# Altium PCB PCB2.PcbDoc
Units mil, origin at the board's own origin, x right, y up, seen from the top; angles counter-clockwise.
Board outline 2885 x 4260 mil, 2 copper layers (Top Layer, Bottom Layer); 27 components, 44 nets, 157 pads, 0 vias.
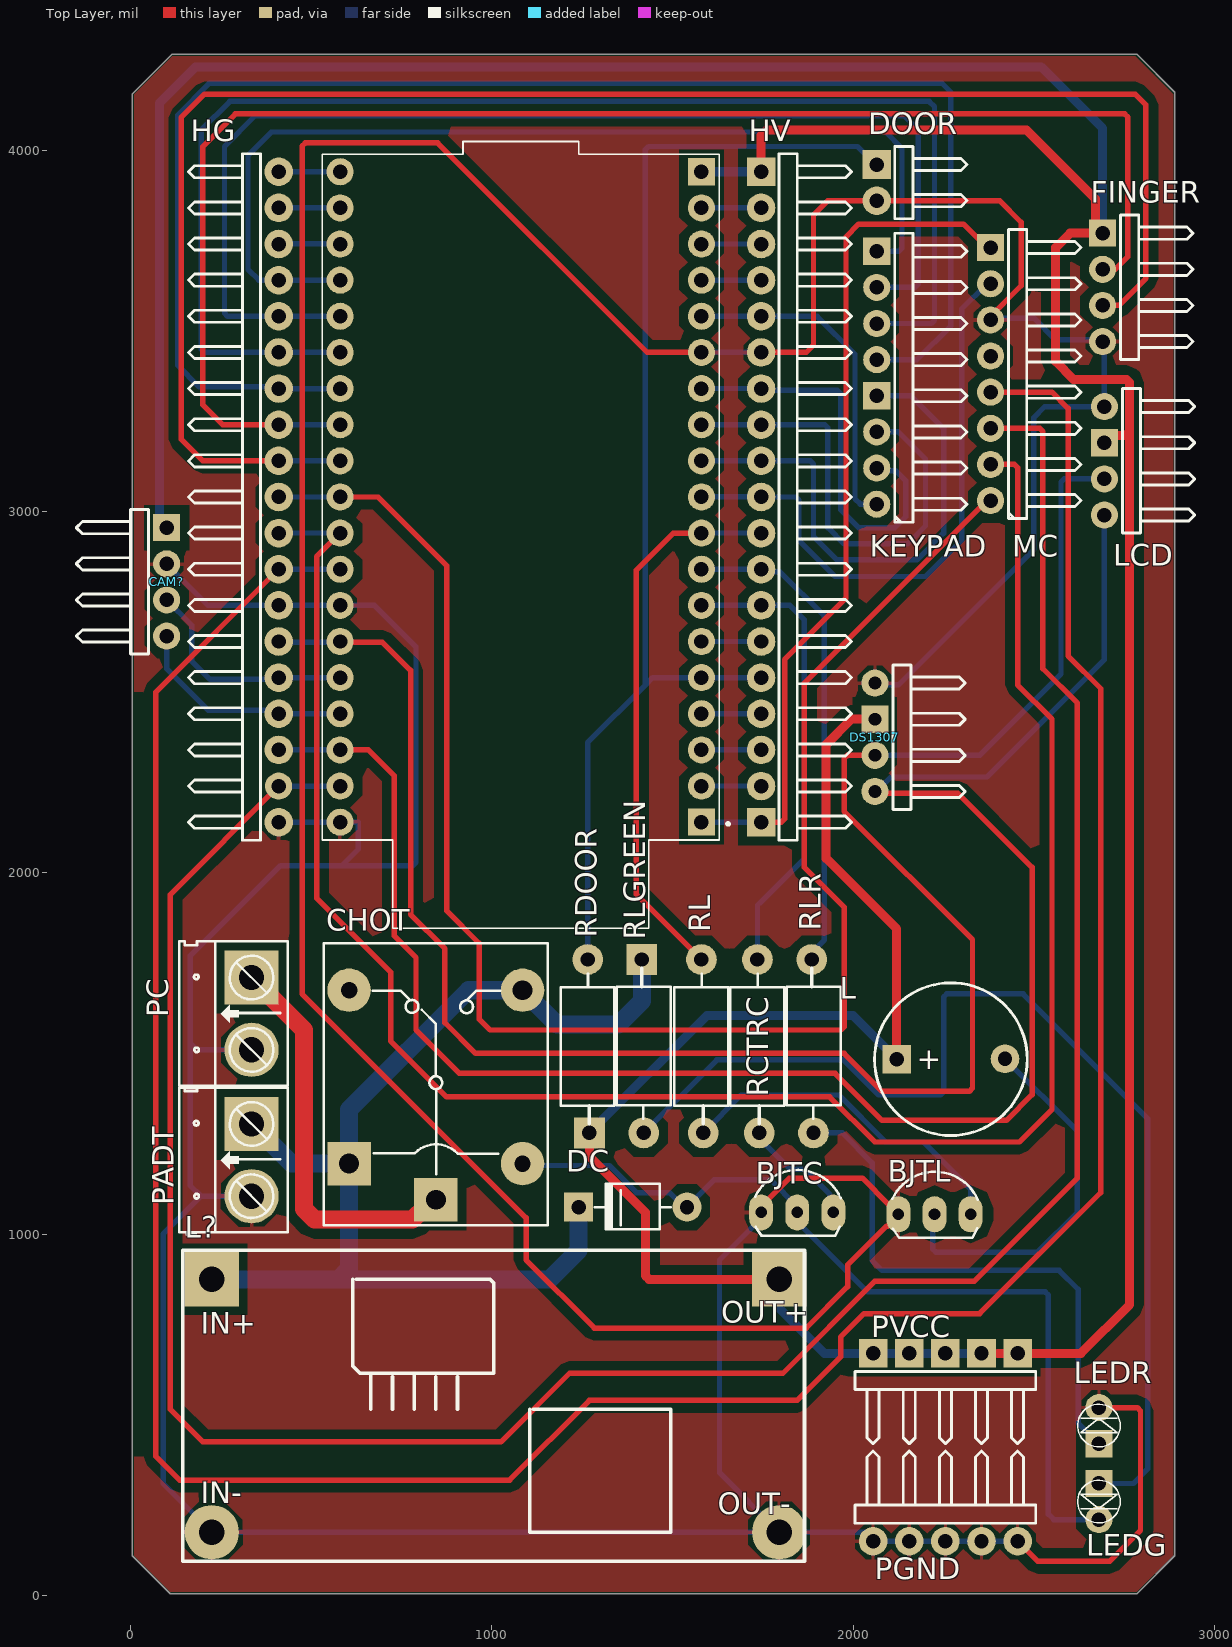
[diagram p0: Top Layer view]
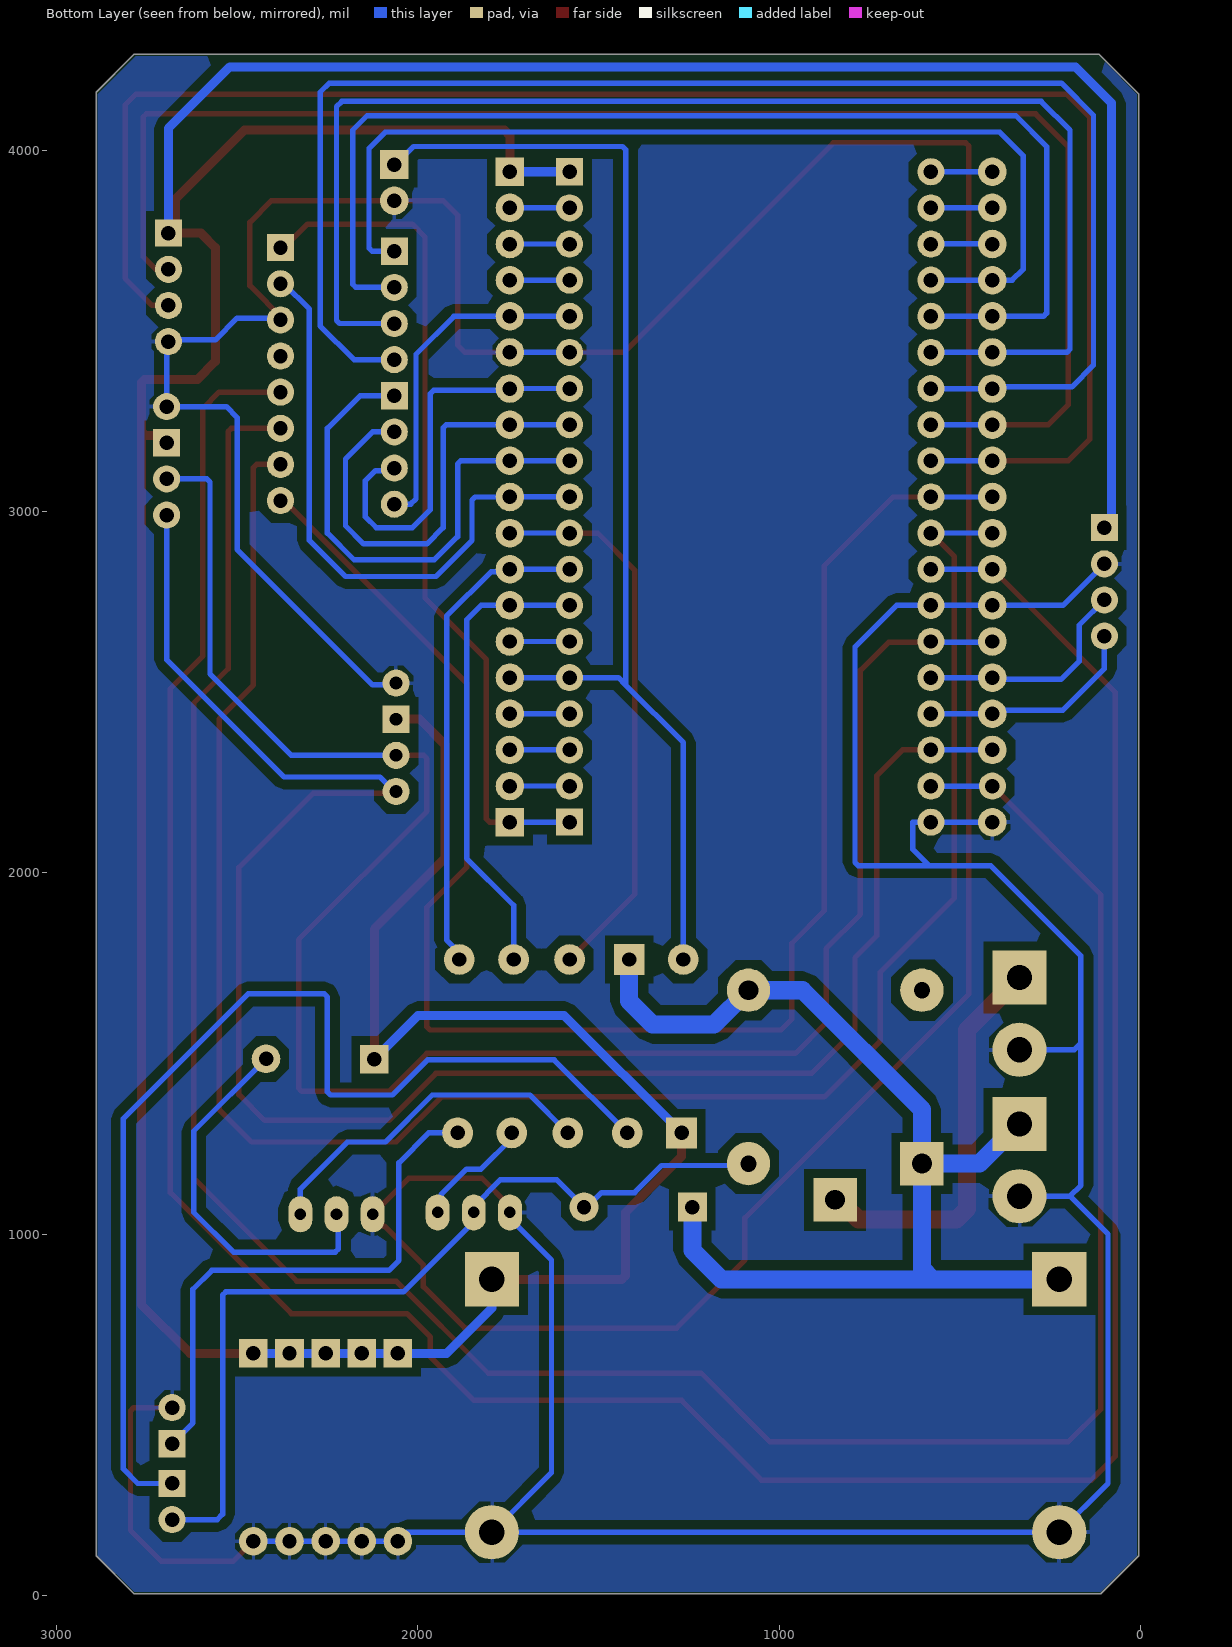
[diagram p1: Bottom Layer view, seen from below]
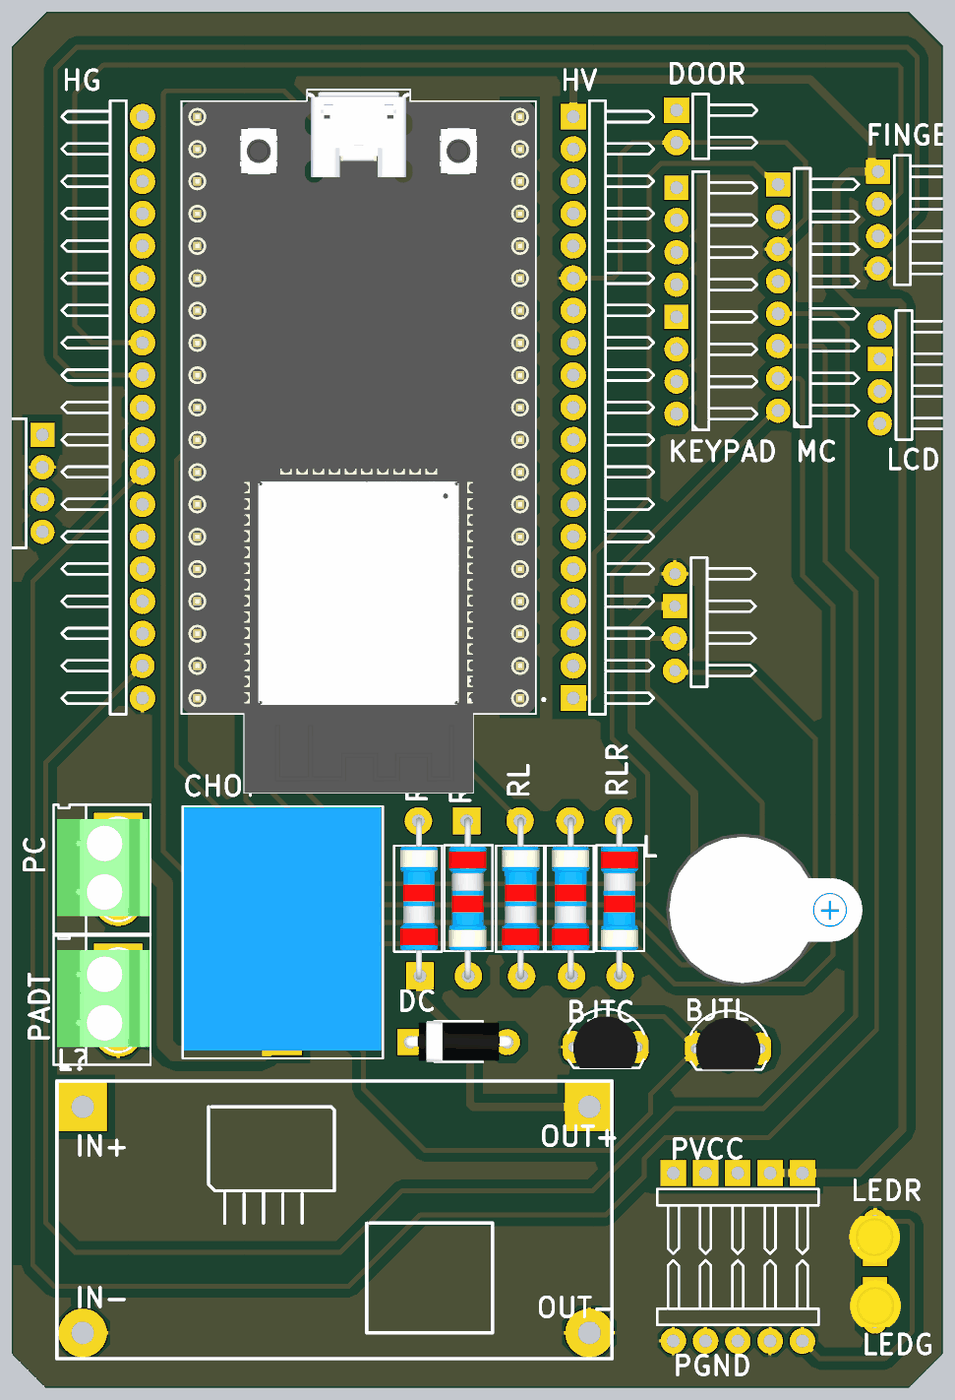
[diagram p2: 3D render of the assembled board from above, using the file's embedded part models]

## Layer stack, top to bottom
Top Solder: solder mask 0.4, Solder Resist, Dk 3.5
Top Layer: signal copper 1.4
Dielectric 1: dielectric 12.6, FR-4, Dk 4.8
Bottom Layer: signal copper 1.4
Bottom Solder: solder mask 0.4, Solder Resist, Dk 3.5

## Board outline
5,110 110,5 2785,5 2890,110 2890,4160 2785,4265 115,4265 5,4155

## Design rules (kind name [scope] priority, off if disabled: settings)
Clearance Clearance_3 [InNamedPolygon('NONET_L02_P-001')] p1: gap=25 ignorepadtopadclearanceinfootprint=TRUE
Clearance Clearance_2 [InNamedPolygon('NONET_L02_P-001')] p2: gap=10 ignorepadtopadclearanceinfootprint=FALSE except(0: Arc-Hole Track-Hole SMDPad-Hole THPad-Hole Via-Hole Fill-Hole Poly-Hole Region-Hole Text-Hole)
Clearance Clearance_1 [InNamedPolygon('NONET_L02_P-001')] p3: gap=25 ignorepadtopadclearanceinfootprint=TRUE
Clearance [All] p4: gap=10 ignorepadtopadclearanceinfootprint=FALSE except(0: Arc-Hole Track-Hole SMDPad-Hole THPad-Hole Via-Hole Fill-Hole Poly-Hole Region-Hole Text-Hole)
PolygonConnect [All] p1: connectstyle=Relief reliefconductorwidth=10 reliefentries=4 polygonreliefangle="90 Angle" airgapwidth=10
RoutingVias [All] p1: holewidth=28 width=50 viastyle="Through Hole" minholewidth=28 minwidth=50 maxholewidth=28 maxwidth=50
SolderMaskExpansion [All] p1: expansion=4 istentingtop=FALSE
Width [All] p1: maxlimit=100 minlimit=10 preferedwidth=15 toplayer_minwidth=15 minimp=50.000000 maximp=50.000000 favimp=50.000000
30 further rules are at their usual default settings.

## Components (designator, comment, footprint, x,y, rotation, side; value= is the part's Value field where it differs from the comment)
BJTC "" TO92 1845,1060 r0 top value=C9014
BJTL "" TO92 2225,1055 r0 top value=C9014
CAM? "" HDR1X4H#1 100,2955 r270 top
CHOT "" "RELAY 5" 845,1420 r90 top value="Relay SPDT, 10A, 12V"
DC "100v" "DIODE 1A" 1590,1075 r0 top
DOOR "" HDR1X2H 2065,3860 r90 top
DS1307 "" HDR1X4H#2 2060,2225 r90 top
FINGER "" HDR1X4H#3 2690,3470 r90 top
HG "" HDR1X19H#1 410,3940 r270 top
HV "" HDR1X19H#2 1745,2140 r90 top
KEYPAD "" HDR1X8H#1 2065,3020 r90 top
L "" "Coi Chip Speacker" 2120,1484.5 r0 top
L? "BUCK_LM2596" BUCK_LM2596 995,555 r0 top
LCD "" HDR1X4H#4 2695,2990 r90 top
LEDG "LED" LED-3MM-YELLOW 2680,310 r270 top value="LED 3 ly Single Colour"
LEDR "LED" LED-3MM-YELLOW 2680,420 r90 top value="LED 3 ly Single Colour"
MC "" HDR1X8H#2 2380,3030 r90 top
PADT "" "Con 2 KF301 5.08" 335,1105 r90 top
PC "" "Con 2 KF301 5.08" 335,1510 r90 top
PGND "eader 5H" HDR1X5H#1 2455,150 r180 top
PVCC "" HDR1X5H#2 2055,670 r0 top
RCTRC "" RES-1/2W#1 1735,1500 r90 top
RDOOR "" RES-1/2W#2 1265,1500 r90 top
RL "" RES-1/2W#1 1580,1500 r90 top
RLGREEN "" RES-1/2W#2 1420,1540 r270 top
RLR "" RES-1/2W#1 1890,1540 r270 top
U? "ESP32-DEVKITC" MODULE_ESP32-DEVKITC 1080,3039.61 r180 top

## Footprints (in the part's own frame and the unit in brackets; to place one, negate y for a bottom-side part, rotate by r counter-clockwise, add the part's x,y. Pads: shape width x height; smd on the part's side, far side on the other; paste and mask are expansions set on the pad)
BUCK_LM2596 [mil]
  rect 150x150 hole 70: 1(-770,320) 4(800,320)
  round 150 hole 70: 2(-770,-380) 3(800,-380)
  silkscreen extent -850,-460 870,400
"Coi Chip Speacker" [mil]
  rect 79.06x79.06 hole 40: 1(0,0)
  round 79.06 hole 40: 2(300,0.5)
  silkscreen extent -61,-212 362,211, body extent -87,-236 521,236, height 177
"Con 2 KF301 5.08" [mil]
  round 150 hole 70: 1(0,0)
  rect 150x150 hole 70: 2(200,0)
  silkscreen extent -106,-100 300,200, body extent -45,-97 255,190, height 335
"DIODE 1A" [mil] "Diode 1A"
  round 80 hole 40: 1(-50,0)
  rect 80x80 hole 40: 2(-350,0)
  silkscreen extent -305,-61 -95,65, body extent -366,-61 -34,65, height 122
HDR1X2H [mil] "Connector; Header; 2 Position; Right Angle"
  round 79.06 hole 40: 1(0,0)
  rect 79.06x79.06 hole 40: 2(100,0)
  silkscreen extent -50,-250 150,-50
HDR1X4H#1 [mil] "Connector; Header; 4 Position; Right Angle"
  rect 75x75 hole 40: 1(0,0)
  round 75 hole 40: 2(100,0) 3(200,0) 4(300,0)
  silkscreen extent -50,-250 350,-50
HDR1X4H#2 [mil] "Connector; Header; 4 Position; Right Angle"
  round 75 hole 35.43: 1(0,0) 2(100,0) 4(300,0)
  rect 75x75 hole 35.43: 3(200,0)
  silkscreen extent -50,-250 350,-50
HDR1X4H#3 [mil] "Connector; Header; 4 Position; Right Angle"
  round 75 hole 40: 1(0,0) 2(100,0) 3(200,0)
  rect 75x75 hole 40: 4(300,0)
  silkscreen extent -50,-250 350,-50
HDR1X4H#4 [mil] "Connector; Header; 4 Position; Right Angle"
  round 75 hole 40: 1(0,0) 2(100,0) 4(300,0)
  rect 75x75 hole 40: 3(200,0)
  silkscreen extent -50,-250 350,-50
HDR1X5H#1 [mil] "Connector; Header; 5 Position; Right Angle"
  round 79.06 hole 40: 1(0,0) 2(100,0) 3(200,0) 4(300,0) 5(400,0)
  silkscreen extent -50,-250 450,-50
HDR1X5H#2 [mil] "Connector; Header; 5 Position; Right Angle"
  rect 79.06x79.06 hole 40: 1(0,0) 2(100,0) 3(200,0) 4(300,0) 5(400,0)
  silkscreen extent -50,-250 450,-50
HDR1X8H#1 [mil] "Connector; Header; 8 Position; Right Angle"
  round 75 hole 40: 1(0,0) 2(100,0) 3(200,0) 5(400,0) 6(500,0) 7(600,0)
  rect 75x75 hole 40: 4(300,0) 8(700,0)
  silkscreen extent -50,-250 750,-50
HDR1X8H#2 [mil] "Connector; Header; 8 Position; Right Angle"
  round 75 hole 40: 1(0,0) 2(100,0) 3(200,0) 4(300,0) 5(400,0) 6(500,0) 7(600,0)
  rect 75x75 hole 40: 8(700,0)
  silkscreen extent -50,-250 750,-50
HDR1X19H#1 [mil] "Connector; Header; 19 Position; Right Angle"
  round 79.06 hole 40: 1(0,0) 2(100,0) 3(200,0) 4(300,0) 5(400,0) 6(500,0) 7(600,0) 8(700,0) 9(800,0) 10(900,0) 11(1000,0) 12(1100,0) 13(1200,0) 14(1300,0) 15(1400,0) 16(1500,0) 17(1600,0) 19(1800,0)
  round 75 hole 40: 18(1700,0)
  silkscreen extent -50,-250 1850,-50
HDR1X19H#2 [mil] "Connector; Header; 19 Position; Right Angle"
  rect 79.06x79.06 hole 40: 1(0,0) 19(1800,0)
  round 79.06 hole 40: 2(100,0) 3(200,0) 4(300,0) 5(400,0) 6(500,0) 7(600,0) 8(700,0) 9(800,0) 10(900,0) 11(1000,0) 12(1100,0) 13(1200,0) 14(1300,0) 15(1400,0) 16(1500,0) 17(1600,0) 18(1700,0)
  silkscreen extent -50,-250 1850,-50
LED-3MM-YELLOW [mil]
  rect 75x75 hole 40: 1(0,0)
  round 75 hole 40: 2(100,0)
  silkscreen extent -9,-59 109,59, body extent -27,-77 117,80, height 181
MODULE_ESP32-DEVKITC [mil]
  rect 75x75 hole 40: 1(-500,899.61) 19(-500,-900.39)
  round 75 hole 40: 2(-500,799.61) 3(-500,699.61) 4(-500,599.61) 5(-500,499.61) 6(-500,399.61) 7(-500,299.61) 8(-500,199.61) 9(-500,99.61) 10(-500,-0.39) 11(-500,-100.39) 12(-500,-200.39) 13(-500,-300.39) 14(-500,-400.39) 15(-500,-500.39) 16(-500,-600.39) 17(-500,-700.39) 18(-500,-800.39) 20(500,-900.39) 21(500,-800.39) 22(500,-700.39) 23(500,-600.39) 24(500,-500.39) 25(500,-400.39) 26(500,-300.39) 27(500,-200.39) 28(500,-100.39) 29(500,-0.39) 30(500,99.61) 31(500,199.61) 32(500,299.61) 33(500,399.61) 34(500,499.61) 35(500,599.61) 36(500,699.61) 37(500,799.61) 38(500,899.61)
  silkscreen extent -578,-984 549,1193, body extent -550,-976 550,1193, height 128
"RELAY 5" [mil] "Reley DPDT, 8 pin, 1A, W400mil, L800mil,H 300mil"
  rect 120x120 hole 55: 1(-325,0) 5(-225,240)
  round 120 hole 45: 2(255,240) 4(-225,-240)
  round 120 hole 55: 3(255,-240)
  silkscreen extent -395,-310 385,310, body extent -371,-304 381,306, height 602
RES-1/2W#1 [mil]
  round 85 hole 40: 1(-220,-5) 2(260,0)
  silkscreen extent -195,-74 221,75, body extent -230,-60 270,56, height 121
RES-1/2W#2 [mil]
  rect 85x85 hole 40: 1(-220,-5)
  round 85 hole 40: 2(260,0)
  silkscreen extent -195,-74 221,75, body extent -230,-60 270,56, height 121
TO92 [mil] "TO-92"
  oval 66x100 hole 32: 1(-100,0) 2(0,0) 3(100,0)
  silkscreen extent -117,-65 120,118, body extent -109,-66 109,95, height 245

## Part data
BJTC BJTL: library part C1815, "NPN transistor"
CAM? DS1307 FINGER LCD: library part "Header 4H", "Header, 4-Pin, Right Angle", LatestRevisionDate=17-Jul-2002, LatestRevisionNote="Re-released for DXP Platform.", Publisher="Altium Limited"
CHOT: library part "Relay 5", "Relay SPDT,10A - 12VDC 5 Pin"
DC: library part "Diode 1N4007", "Cắm", Chung_Loai=Cắm, Don_Vi=Con, Ma_Hang=MH001063, Ten_Linh_Kien="Diode 1N4007 1A (DIP)"
DOOR: library part "Header 2H", "Header, 2-Pin, Right Angle", LatestRevisionDate=17-Jul-2002, LatestRevisionNote="Re-released for DXP Platform.", Publisher="Altium Limited"
HG HV: library part "Header 19H", "Header, 19-Pin, Right Angle", LatestRevisionDate=17-Jul-2002, LatestRevisionNote="Re-released for DXP Platform.", Publisher="Altium Limited"
KEYPAD MC: library part "Header 8H", "Header, 8-Pin, Right Angle", LatestRevisionDate=17-Jul-2002, LatestRevisionNote="Re-released for DXP Platform.", Publisher="Altium Limited"
L: library part "Coi Chip Speaker", "Còi chip"
LEDG LEDR: "LED Single colour Green and Red"
PADT PC: library part "CON 2 KF301", "Cắm", Chung_Loai=Cắm, Don_Vi=Con, Ma_Hang=MH000987, Ten_Linh_Kien="CON 2 KF301-2P 5.08MM Xanh Dương"
PGND PVCC: library part "Header 5H", "Header, 5-Pin, Right Angle", LatestRevisionDate=17-Jul-2002, LatestRevisionNote="Re-released for DXP Platform.", Publisher="Altium Limited"
RCTRC RDOOR RL RLGREEN RLR: library part Res, "Res", Manufacturer="Generic Components", Class=Passive, Published=08/06/2000, Publisher="Altium Hobart Technology Centre", SubClass=R
U?: "ESP32-WROOM-32UE series Transceiver; 802.11 b/g/n (Wi-Fi, WiFi, WLAN), Bluetooth Â® Smart Ready 4.x Dual Mode Evaluation Board", Package=None, Availability="In Stock", Check_prices=https://www.snapeda.com/parts/ESP32-DEVKITC/Espressif+Systems/view-part/?ref=eda, MF="Espressif Systems", MP=ESP32-DEVKITC, Price=None, Purchase-URL=https://pricing.snapeda.com/search/part/ESP32-DEVKITC/?ref=eda, SnapEDA_Link=https://www.snapeda.com/parts/ESP32-DEVKITC/Espressif+Systems/view-part/?ref=snap

## Nets (pads, with @x,y where several pads share a name; then routed paths per layer and width w, separated by ;. In a path a pad name is that pad's centre, name@x,y a point inside that pad or via, vN(x,y) a via of type N, cw(c..) or ccw(c..) an arc to the next point about the centre after c; other vN are vias at no path point)
3V3: HV.1 MC.8 U?.1 | length 2346.7
  Top Layer w15: HV.1 1801.21,2140 1810,2148.79 1810,2590 1980,2760 1980,3760 2015,3795 2305,3795 MC.8@2370,3730
  Bottom Layer w15: U?.1 HV.1
12V: CHOT.3 CHOT.5 DC.2 L?.1 PADT.2 RLGREEN.1 | length 3094.1
  Bottom Layer w50: L?.1 575,875 ; PADT.2 445,1195 CHOT.5 ; DC.2 1240,955 1160,875 575,875 ; RLGREEN.1 1415,1645 1350,1580 1180,1580 CHOT.3 935,1675 605,1345 CHOT.5 ; 575,875 605,905 CHOT.5
BUZZER: HV.9 RL.2 U?.9 | length 1550
  Top Layer w15: RL.2 1400,1940 1400,2838 1502,2940 U?.9
  Bottom Layer w15: U?.9@1570,2940.39 1580,2940.39 1580.2,2940.2 1744.8,2940.2 HV.9
C0: HV.11 KEYPAD.4 U?.11 | length 1444.2
  Bottom Layer w15: U?.11 HV.11 1881.21,3140 1890,3131.21 1890,2930.36 1954.5,2865.86 2175.86,2865.86 2250,2940 2250,3230 2160,3320 KEYPAD.4
C1: HV.12 KEYPAD.3 U?.12 | length 1290.1
  Bottom Layer w15: U?.12 HV.12 1921.21,3240 1930,3231.21 1930,2955 1975,2910 2149.64,2910 2200,2960.36 2200,3145 2125,3220 KEYPAD.3
C2: HV.13 KEYPAD.2 U?.13 | length 1129.7
  Bottom Layer w15: U?.13@1570,3340.39 1580,3340.39 1580.2,3340.2 1744.8,3340.2 HV.13 1750,3335 1956.21,3335 1965,3326.21 1965,3005 2015,2955 2115,2955 2145,2985 2145,3085 2117.03,3112.97 2072.03,3112.97 KEYPAD.2
C3: HV.15 KEYPAD.1 U?.15 | length 934.7
  Bottom Layer w15: U?.15 HV.15 1900,3540 2005,3435 2005,3035 2020,3020 KEYPAD.1
CLK: HG.11 MC.2 U?.30 | length 5554.5
  Top Layer w15: U?.30 515,2875 515,1930 720,1725 720,1535 875,1380 1935,1380 2060,1255 2460,1255 2550,1345 2550,2425 2455,2520 2455,3121.21 2446.21,3130 MC.2
  Bottom Layer w15: HG.11 410.2,2940.2 569.8,2940.2 U?.30@570,2940.39
CRX: CAM?.4 HG.16 U?.35 | length 611.9
  Bottom Layer w15: CAM?.4 100,2565 215,2450 400,2450 HG.16 410.2,2440.2 569.8,2440.2 U?.35@570,2440.39
CTRL_C: HV.7 RCTRC.2 U?.7 | length 1283.2
  Bottom Layer w15: U?.7@1585.2,2740.2 1744.8,2740.2 HV.7 1825,2740 1865,2700 1865,2040 1740,1915 ; RCTRC.2 1735,1910
CTX: CAM?.3 HG.15 U?.34 | length 621.9
  Bottom Layer w15: CAM?.3 170,2685 170,2585 220,2535 405,2535 HG.15 410.2,2540.2 569.8,2540.2 U?.34@570,2540.39
DOOR: DOOR.2 HV.5 RDOOR.2 U?.5 | length 3300.1
  Bottom Layer w15: RDOOR.2 1265,2360 1425,2520 ; HV.5 U?.5 1445,2540 1425,2520 ; DOOR.2 2061.42,3960 2011.42,4010 1433.79,4010 1425,4001.21 1425,2520
GND: BJTC.1 BJTL.1 CAM?.2 DOOR.1 DS1307.4 FINGER.1 HG.13 HG.19 HV.14 L?.2 L?.3 LCD.4 LEDR.2 MC.6 PADT.1 PC.1 PGND.1 PGND.2 PGND.3 PGND.4 PGND.5 U?.14 U?.32 U?.38 | length 18325.4
  Top Layer w15: U?.14 1430,3440 850,4020 483.79,4020 475,4011.21 475,1665 1095,1045 1095,928.79 1283.79,740 1870,740 1984.75,854.75 1984.75,914.75 2092.26,1022.26 2095.46,1022.26 2125,1051.8 BJTL.1 2125,1058.2 2101.44,1081.76 2098.24,1081.76 2025,1155 1823,1155 1745,1077 BJTC.1 ; HV.14 1870,3440 1890,3460 1890,3820 1930,3860 DOOR.1 2405,3860 2465,3800 2465,3625 MC.6@2370,3530 ; PGND.3@2250,145 PGND.3 ; PGND.1 2510,95 2710,95 2795,180 2795,511.21 2786.21,520 LEDR.2
  Bottom Layer w15: CAM?.2 215,2740 HG.13 U?.32 675,2740 790,2625 790,2028.79 781.21,2020 585,2020 ; PADT.1 195,1105 ; PC.1 183.79,1510 165,1528.79 ; HG.19 U?.38 630,2140 630,2065 585,2020 ; U?.14 HV.14 ; BJTC.1 1745,1043 1630,928 1630,340 L?.3 ; DS1307.4@2050,2520 2125,2520 2500,2895 2500,3260 2530,3290 LCD.4 2695,3465 FINGER.1 ; MC.6@2370,3530 2375,3535 2500,3535 2560,3475 2670,3475 FINGER.1@2670,3470 ; PGND.1 PGND.2 PGND.3 PGND.4 PGND.5 2030,175 L?.3 ; 165,1528.79 165,1135 195,1105 ; 165,1528.79 165,1770 415,2020 585,2020 ; 195,1105 90,1000 90,310 L?.2 L?.3
LEDR: HV.8 RLR.1 U?.8 | length 1358.1
  Bottom Layer w15: U?.8@1580,2840.2 HV.8@1744.8,2840.2 ; HV.8 1751.36,2833.64 1796.36,2833.64 1920,2710 1920,1813.94 1885,1778.94 RLR.1
MISO: HG.12 MC.4 U?.31 | length 8220.8
  Top Layer w15: HG.12 70,2500 70,385 135.68,319.32 1049.32,319.32 1270,540 1845,540 1965,660 1965,715 2030,780 2350,780 2685,1115 2685,2510 2595,2600 2595,3285 2550,3330 MC.4@2370,3330
  Bottom Layer w15: HG.12 U?.31
MOSI: HG.18 MC.3 U?.37 | length 7133.1
  Top Layer w15: HG.18 110,1940 110,515 200,425 1025,425 1215,615 1805,615 2060,870 2335,870 2620,1155 2620,2469.66 2525,2564.66 2525,3221.21 2516.21,3230 MC.3 MC.3@2370,3230
  Bottom Layer w15: HG.18 U?.37
NetBJTC_2: BJTC.2 CHOT.4 DC.1 LEDG.2 | length 2444.8
  Bottom Layer w15: CHOT.4 1090,1190 1325,1190 1400,1115 1491.61,1115 1531.61,1075 DC.1 1615,1150 1772,1150 1845,1077 1845,1035 2040,840 2531.21,840 2540,831.21 2540,225 2555,210 LEDG.2
NetBJTC_3: BJTC.3 RCTRC.1 | length 328.3
  Bottom Layer w15: RCTRC.1 1740,1265 1825,1180 1865,1180 1935.24,1109.76 1935.24,1069.76 BJTC.3
NetBJTL_2: BJTL.2 L.2 | length 1055.3
  Bottom Layer w15: BJTL.2 2220,1050 2220,958.79 2228.79,950 2510,950 2620,1060 2620,1285 L.2
NetBJTL_3: BJTL.3 RL.1 | length 961.2
  Bottom Layer w15: RL.1 1690,1385 1960,1385 2090,1255 2195,1255 2325,1125 BJTL.3
NetHG_1: HG.1 U?.20 | length 170
  Bottom Layer w15: HG.1 U?.20
NetHG_2: HG.2 U?.21 | length 160.2
  Bottom Layer w15: HG.2 410.2,3840.2 569.8,3840.2 U?.21@570,3840.39
NetHG_3: HG.3 U?.22 | length 160.2
  Bottom Layer w15: HG.3 410.2,3740.2 569.8,3740.2 U?.22@570,3740.39
NetHV_2: HV.2 U?.2 | length 175.2
  Bottom Layer w15: U?.2@1570,2240.39 1580,2240.39 1580.2,2240.2 1744.8,2240.2 HV.2
NetHV_3: HV.3 U?.3 | length 165
  Bottom Layer w15: U?.3 HV.3
NetHV_4: HV.4 U?.4 | length 165
  Bottom Layer w15: U?.4 HV.4
NetHV_6: HV.6 U?.6 | length 165
  Bottom Layer w15: U?.6 HV.6
NetHV_16: HV.16 U?.16 | length 165
  Bottom Layer w15: U?.16 HV.16
NetHV_17: HV.17 U?.17 | length 165
  Bottom Layer w15: U?.17 HV.17
NetHV_18: HV.18 U?.18 | length 165
  Bottom Layer w15: U?.18 HV.18
NetLEDG_1: LEDG.1 RLGREEN.2 | length 3053.4
  Bottom Layer w15: RLGREEN.2 1622.5,1482.5 1972.5,1482.5 2070,1385 2241.21,1385 2250,1393.79 2250,1656.21 2258.79,1665 2470,1665 2815,1320 2815,350 2775,310 LEDG.1
NetLEDR_1: LEDR.1 RLR.2 | length 1521.1
  Bottom Layer w15: RLR.2 1970,1280 2052.5,1197.5 2052.5,927.5 2080,900 2570,900 2622.5,847.5 2622.5,477.5 LEDR.1
PC: CHOT.1 PC.2 | length 1112.6
  Top Layer w15: CHOT.1@816.59,1095 CHOT.1
  Top Layer w50: PC.2 480,1565 480,1069.29 509.29,1040 780.71,1040 817.49,1076.78 817.49,1094.1 CHOT.1@816.59,1095
R0: HG.4 KEYPAD.8 U?.23 | length 2787.8
  Bottom Layer w15: U?.23 HG.4 355,3640 325,3670 325,3985 390,4050 2090,4050 2135,4005 2135,3728.79 2126.21,3720 KEYPAD.8
R1: HG.5 KEYPAD.7 U?.24 | length 3301.5
  Bottom Layer w15: U?.24 HG.5 268.79,3540 260,3548.79 260,4010 345,4095 2140,4095 2180,4055 2180,3628.79 2171.21,3620 KEYPAD.7
R2: HG.6 KEYPAD.6 U?.25 | length 3818.8
  Bottom Layer w15: U?.25 HG.6 203.96,3440 195.18,3448.79 195.18,4055.18 275,4135 2210,4135 2225,4120 2225,3528.79 2216.21,3520 KEYPAD.6
R3: HG.7 KEYPAD.5 U?.26 | length 4245.6
  Bottom Layer w15: U?.26 HG.7 405,3345 190,3345 130,3405 130,4096.39 218.61,4185 2245,4185 2270,4160 2270,3513.43 2176.57,3420 KEYPAD.5
RSTSPI: HV.10 MC.7 U?.10 | length 1656.8
  Bottom Layer w15: U?.10@1580,3040.2 1744.8,3040.2 HV.10 1841.21,3040 1850,3031.21 1850,2920 1950,2820 2200,2820 2300,2920 2300,3560 MC.7@2370,3630
RX2: FINGER.3 HG.8 U?.27 | length 4209.4
  Top Layer w15: HG.8 255,3240 200,3295 200,4010 290,4100 2751.21,4100 2760,4091.21 2760,3705 2725,3670 FINGER.3@2670,3670
  Bottom Layer w15: HG.8 U?.27
SCL: DS1307.1 HG.17 LCD.1 U?.36 | length 5250.7
  Top Layer w15: U?.36 658,2340 730,2268 730,1825 790,1765 790,1565 910,1445 1950,1445 2080,1315 2423.93,1315 2495,1386.07 2495,2015 2290,2220 DS1307.1@2060,2220
  Bottom Layer w15: HG.17 U?.36 ; DS1307.1 2065,2225 2105,2265 2370,2265 2695,2590 LCD.1
SDA: DS1307.2 HG.14 LCD.2 U?.33 | length 5366
  Top Layer w15: U?.33@580,2637.79 697.21,2637.79 775,2560 775,1885 870,1790 870,1585 955,1500 1975,1500 2080,1395 2321.21,1395 2330,1403.79 2330,1815 1975,2170 1975,2316.21 1983.79,2325 DS1307.2
  Bottom Layer w15: HG.14 412.21,2637.79 U?.33@580,2637.79 ; DS1307.2 2350,2325 2575,2550 2575,3081.21 2583.79,3090 LCD.2
SS: HG.10 MC.1 U?.29 | length 4573
  Top Layer w15: U?.29 685,3040 875,2850 875,1895 965,1805 965,1595 995,1565 1966.21,1565 1975,1573.79 1975,1905 1865,2015 1865,2525 MC.1@2370,3030
  Bottom Layer w15: HG.10 U?.29
TX2: FINGER.2 HG.9 U?.28 | length 4715.3
  Top Layer w15: HG.9 200,3140 140,3200 140,4090 205,4155 2780,4155 2810,4125 2810,3645 2735,3570 FINGER.2@2670,3570
  Bottom Layer w15: HG.9 U?.28
VCC: CAM?.1 DS1307.3 FINGER.4 HV.19 L.1 L?.4 LCD.3 PVCC.1 PVCC.2 PVCC.3 PVCC.4 PVCC.5 RDOOR.1 U?.19 | length 13066.2
  Top Layer w25: RDOOR.1 1270,1215 1425,1060 1425,885 1435,875 L?.4 ; HV.19 1745,4040.36 1759.64,4055 2480,4055 2670,3865 2670,3770 2600,3770 2560,3730 2560,3415 2610,3365 2756.21,3365 2765,3356.21 2765,3221.43 ; DS1307.3 1995,2425 1925,2355 1925,2040 2120,1845 L.1 ; 2400,670 PVCC.5 2630,670 2765,805 2765,3221.43 ; LCD.3 2714.73,3209.73 2753.3,3209.73 2765,3221.43
  Bottom Layer w25: CAM?.1 82.97,2972.03 82.97,2983.7 80,2986.67 80,4130 180,4230 2520,4230 2690,4060 FINGER.4 ; RDOOR.1 1595,1605 1999.5,1605 L.1 ; U?.19 HV.19 ; L?.4 1795,795 1920,670 PVCC.1 PVCC.2 PVCC.3 PVCC.4 PVCC.5
pads on no net: CHOT.2 MC.5

## Polygon pours and split planes (outlines as drawn)
GND on Bottom Layer "NONET_L02_P-001" (solid, remove dead copper, pour order 0): 110,10 10,110 10,4155 115,4260 2780,4260 2885,4155 2885,110 2785,10
GND on Top Layer "NONET_L02_P-001" (solid, remove dead copper, pour order 1): 10,4155 115,4260 2780,4260 2885,4155 2885,110 2785,10 110,10 10,110

## Text inside footprints (layer, text, board x,y; h text height)
L: Top Overlay "+" at 2175.5,1456.5 h60
L?: Top Overlay "OUT-" at 1625,225 h60; Top Overlay "OUT+" at 1635,755 h60; Top Overlay "IN-" at 195,255 h60; Top Overlay "IN+" at 195,725 h60